# EAGLE board BrewTrollerRelayBoard (EAGLE 5.00)
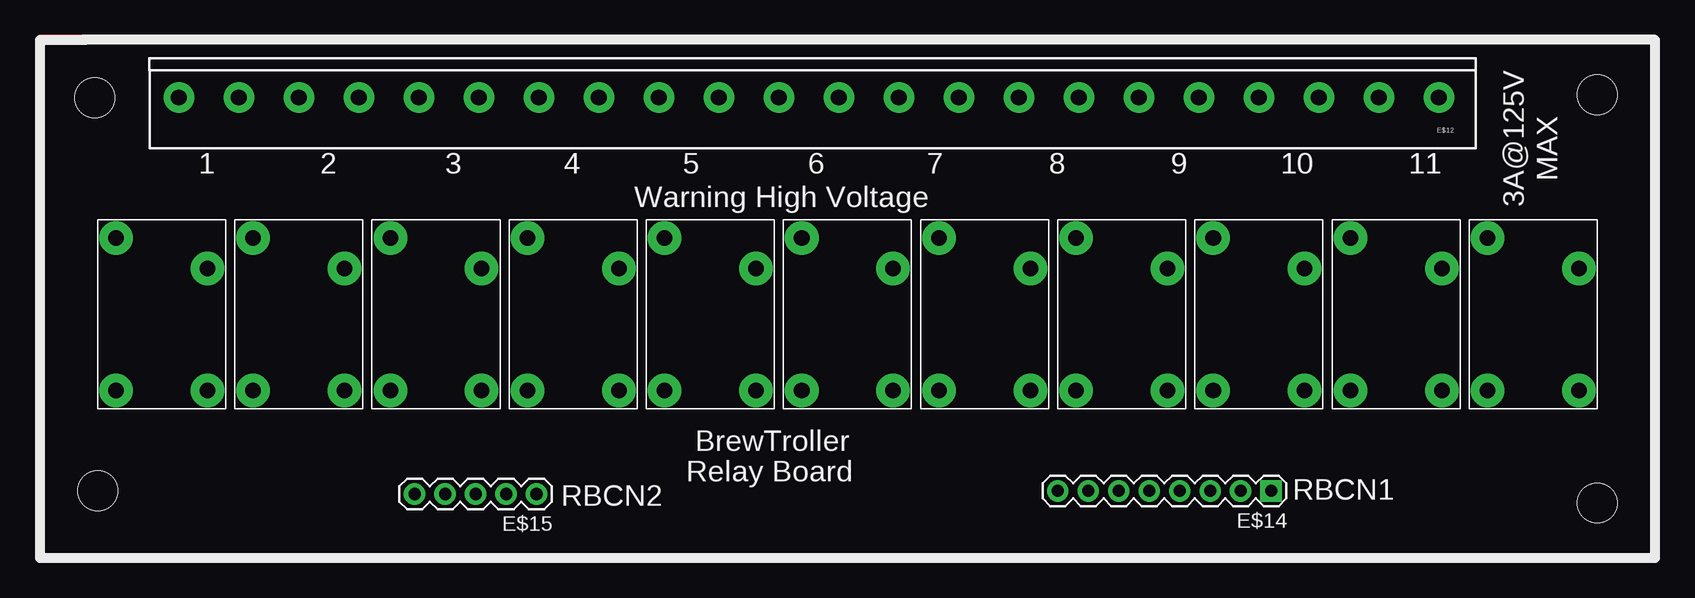
[diagram p0: board, top side]
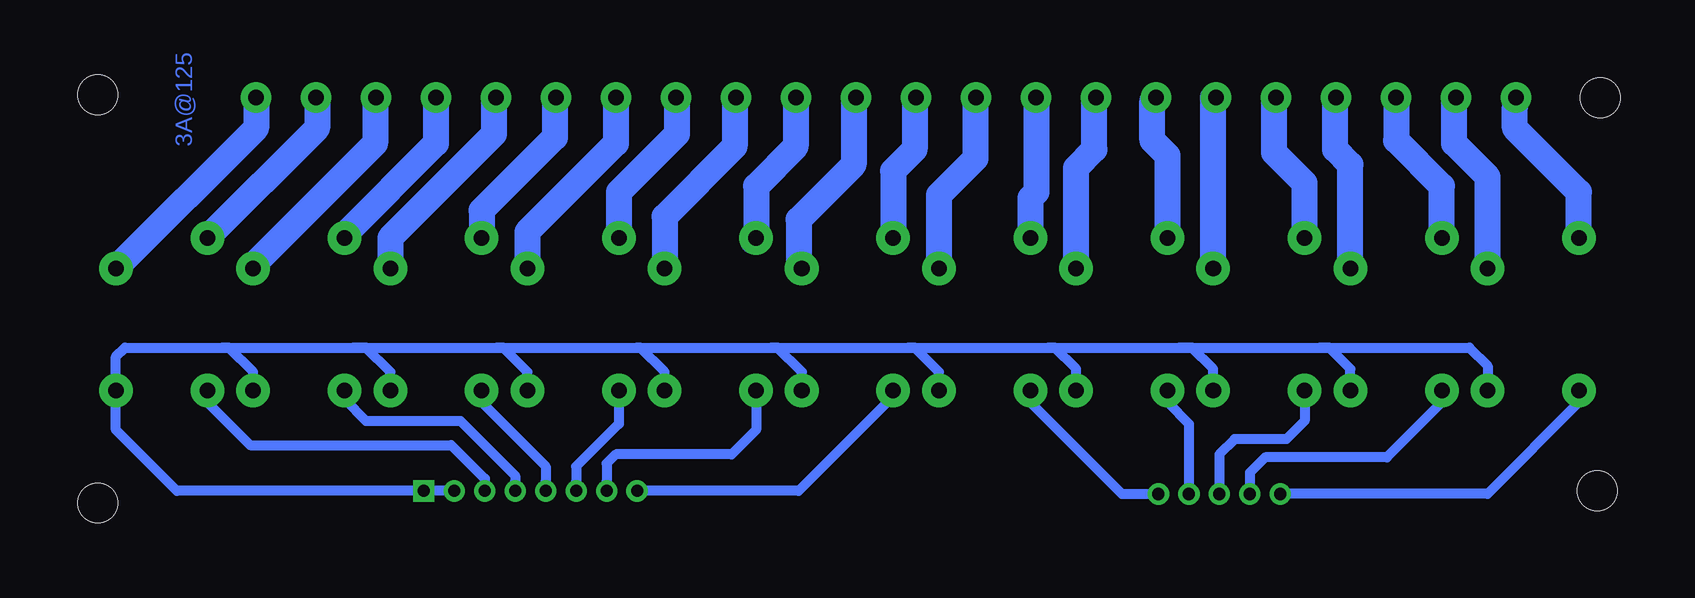
[diagram p1: board, bottom side, seen from below]

No outline drawn. Coordinates in mm, seen from the top.
Copper layers (1*16): Top 0.035mm / dielectric 1.5mm / Bottom 0.035mm
Design rules "default": minimum track width 10mil, minimum drill 24mil, track to track 8mil, track to pad 8mil, pad to pad 8mil, via to via 8mil, smd to smd 8mil, copper to edge 40mil, drill to drill 8mil, minimum pad ring 10mil, minimum via ring 8mil, stop-mask expansion 4mil, vias tented up to drill 0mil, thermal gap 10mil

## Footprints (pad centres in the part's own frame; a part is rotated, then mirrored left to right if it is on the bottom)
TYCOT77RELAY = drill 1.295 pad 2.794 round: PIN1 0,7.62; PIN2 0,0; PIN3 12.7,7.62; PIN4 10.16,0
SCREWTERMINAL5MM22PIN = drill 1.3 pad 2.54 round: 1 -5.08,0; 2 -0.08,0; 3 4.92,0; 4 9.92,0; 5 14.92,0; 6 19.92,0; 7 24.92,0; 8 29.92,0; 9 34.92,0; 10 39.92,0; 11 44.92,0; 12 49.92,0; 13 -5.08,0; 14 -0.08,0; 15 4.92,0; 16 9.92,0; 17 14.92,0; 18 19.92,0; 19 24.92,0; 20 29.92,0; 21 34.92,0; 22 39.92,0; 23 44.92,0; 24 49.92,0; 25 54.92,0; 26 59.92,0; 27 64.92,0; 28 69.92,0; 29 74.92,0; 30 79.92,0; 31 84.92,0; 32 89.92,0; 33 94.92,0; 34 99.92,0; 36 54.92,0; 37 59.92,0; 38 64.92,0; 39 69.92,0; 40 74.92,0; 41 79.92,0; 42 84.92,0; 43 89.92,0; 44 94.92,0; 45 99.92,0
STAND-OFF = hole 3.302: 0,0
1X08 = drill 1.016 pad 1.778 square: 1 0,0 | drill 1.016 pad 1.778 round: 2 2.54,0; 3 5.08,0; 4 7.62,0; 5 10.16,0; 6 12.7,0; 7 15.24,0; 8 17.78,0
1X05 = drill 1.016 pad 1.778 round: 1 0,0; 2 2.54,0; 3 5.08,0; 4 7.62,0; 5 10.16,0

## Placement (x,y rotation side)
E$1  [TYCOT77RELAY]  43.18,53.34 90 top
E$2  [TYCOT77RELAY]  54.61,53.34 90 top
E$3  [TYCOT77RELAY]  66.04,53.34 90 top
E$4  [TYCOT77RELAY]  77.47,53.34 90 top
E$5  [TYCOT77RELAY]  88.9,53.34 90 top
E$6  [TYCOT77RELAY]  100.33,53.34 90 top
E$7  [TYCOT77RELAY]  111.76,53.34 90 top
E$8  [TYCOT77RELAY]  123.19,53.34 90 top
E$9  [TYCOT77RELAY]  134.62,53.34 90 top
E$10  [TYCOT77RELAY]  31.75,53.34 90 top
E$11  [TYCOT77RELAY]  20.32,53.34 90 top
E$12  [SCREWTERMINAL5MM22PIN]  117.86,77.72 180 top
E$13  [STAND-OFF]  10.92,77.72 0 top
E$14  [1X08]  108.97,44.96 180 top
E$15  [1X05]  47.75,44.7 180 top
E$16  [STAND-OFF]  136.14,77.98 0 top
E$17  [STAND-OFF]  11.18,44.96 0 top
E$18  [STAND-OFF]  136.14,43.94 0 top

## Library data of the parts
E$1-E$12 = Personal
E$13-E$18 = SparkFun

## Nets
S$1: E$11.PIN3
S$2: E$11.PIN4
S$3: E$10.PIN3
S$4: E$10.PIN4
S$5: E$1.PIN3
S$6: E$1.PIN4
S$7: E$2.PIN3
S$8: E$2.PIN4
S$10: E$3.PIN4
S$11: E$4.PIN3
S$15: E$6.PIN3
S$18: E$7.PIN4
S$21: E$9.PIN3
S$22: E$9.PIN4
S$32: E$1.PIN2 E$2.PIN2 E$3.PIN2 E$4.PIN2 E$5.PIN2 E$6.PIN2 E$7.PIN2 E$8.PIN2 E$10.PIN2 E$11.PIN2 E$14.2

## Tracks (layer width: path | path; a pad name or v marks a point on that pad's centre or on a via)
S$1
  Bottom 2.184: E$11.PIN3 12.7,69.85 18.03,75.18 18.03,76.96
S$2
  Bottom 2.184: E$11.PIN4 20.32,71.12 23.11,73.91 23.11,77.72
S$3
  Bottom 2.184: E$10.PIN3 24.13,70.36 27.94,74.17 27.94,77.72
S$4
  Bottom 2.184: E$10.PIN4 31.75,72.14 33.02,73.41 33.02,77.72
S$5
  Bottom 2.184: E$1.PIN3 35.56,70.61 38.1,73.15 38.1,77.72
S$6
  Bottom 2.184: E$1.PIN4 43.18,77.72
S$7
  Bottom 2.184: E$2.PIN3 46.99,72.9 48.26,74.17 48.26,77.47 48.01,77.72
S$8
  Bottom 2.184: E$2.PIN4 54.61,71.88 53.09,73.41 53.09,77.47
S$9
  Bottom 2.184: 57.91,77.72 57.91,69.85 58.42,69.34 58.42,66.29
S$10
  Bottom 2.184: 62.99,77.72 62.99,72.64 66.04,69.6 E$3.PIN4
S$11
  Bottom 2.184: 68.07,77.72 68.07,73.41 69.85,71.63 E$4.PIN3
S$12
  Bottom 2.184: 73.15,77.72 73.15,72.14 77.72,67.56 77.72,63.5
S$13
  Bottom 2.184: 77.98,77.72 77.98,73.66 81.28,70.36 81.28,66.04 81.53,65.79
S$14
  Bottom 2.184: 83.06,77.72 83.06,73.66 88.9,67.82 88.9,63.75
S$15
  Bottom 2.184: 87.88,77.72 87.88,74.68 92.71,69.85 E$6.PIN3
S$16
  Bottom 2.184: 92.96,77.72 92.96,73.91 100.33,66.55 100.33,63.75
S$17
  Bottom 2.184: 98.04,77.72 98.04,74.42 104.14,68.33 104.14,65.79
S$18
  Bottom 2.184: 103.12,77.72 103.12,74.68 111.76,66.04 E$7.PIN4
S$19
  Bottom 2.184: 107.95,77.72 107.95,73.91 115.57,66.29
S$20
  Bottom 2.184: 113.03,77.72 113.03,73.91 123.19,63.75
S$21
  Bottom 2.184: 117.86,77.72 117.86,75.18 E$9.PIN3
S$22
  Bottom 2.184: 122.94,77.72 122.94,75.18 E$9.PIN4
S$23
  Bottom 0.813: 12.7,52.32 20.32,44.7 37.08,44.7
S$24
  Bottom 0.813: 24.13,52.32 28.7,47.75 38.86,47.75 40.13,46.48 40.13,45.21
S$25
  Bottom 0.813: 35.56,52.32 35.56,50.8 37.08,49.28 41.4,49.28 42.67,48.01 42.67,45.47
S$26
  Bottom 0.813: 46.99,52.32 45.21,50.55 45.21,45.47
S$27
  Bottom 0.813: 58.42,52.32 50.8,44.7 48.26,44.7
S$28
  Bottom 0.813: 70.1,52.58 77.72,44.96 90.68,44.96
S$29
  Bottom 0.813: 81.28,52.32 81.28,50.04 83.31,48.01 92.96,48.01 93.73,47.24 93.73,45.72
S$30
  Bottom 0.813: 92.71,52.32 92.71,50.55 96.27,46.99 96.27,45.72
S$31
  Bottom 0.813: 104.14,52.32 98.81,46.99 98.81,45.72
S$32
  Bottom 0.813: E$8.PIN2 123.19,54.86 125.22,56.9 125.73,56.9 | E$7.PIN2 111.76,54.86 113.79,56.9 114.81,56.9 | E$6.PIN2 100.33,54.86 102.36,56.9 102.87,56.9 | E$5.PIN2 88.9,54.86 90.93,56.9 91.19,56.9 | E$4.PIN2 77.47,54.86 79.5,56.9 80.01,56.9 | E$3.PIN2 66.04,54.86 68.07,56.9 68.58,56.9 | E$2.PIN2 54.61,55.12 56.39,56.9 56.9,56.9 | E$1.PIN2 43.18,55.12 44.96,56.9 45.97,56.9 | E$10.PIN2 31.75,55.12 33.53,56.9 34.29,56.9 | E$14.2 129.54,44.96 134.62,50.04 134.62,56.13 133.86,56.9 125.73,56.9 | 125.73,56.9 114.81,56.9 | 114.81,56.9 102.87,56.9 | 102.87,56.9 91.19,56.9 | 91.19,56.9 80.01,56.9 | 80.01,56.9 68.58,56.9 | 68.58,56.9 56.9,56.9 | 56.9,56.9 45.97,56.9 | 45.97,56.9 34.29,56.9 | 34.29,56.9 21.84,56.9 20.32,55.37 E$11.PIN2
S$33
  Bottom 0.813: 115.57,52.58 113.79,50.8 105.92,50.8 101.35,46.23 101.35,45.72
S$34
  Bottom 0.813: 127,52.32 123.44,48.77 106.68,48.77 103.89,45.97 103.89,45.72
S$35
  Top 0.813: 6.35,82.55 6.35,39.37 140.97,39.37 140.97,82.55 6.35,82.55

## Text on the board
Bottom: 3A@125
tPlace: 3A@125V | MAX | 1 | 2 | 3 | 4 | 5 | 6 | 7 | 8 | 9 | 10 | 11 | Warning High Voltage
tNames: BrewTroller | Relay Board | RBCN2 | RBCN1